# Altium PCB POWER.PcbDoc
Units mm, origin at the board's own origin, x right, y up, seen from the top; angles counter-clockwise.
Board outline 166.37 x 101.6 mm, 2 copper layers (Top Layer, Bottom Layer); 110 components, 38 nets, 257 pads, 26 vias.
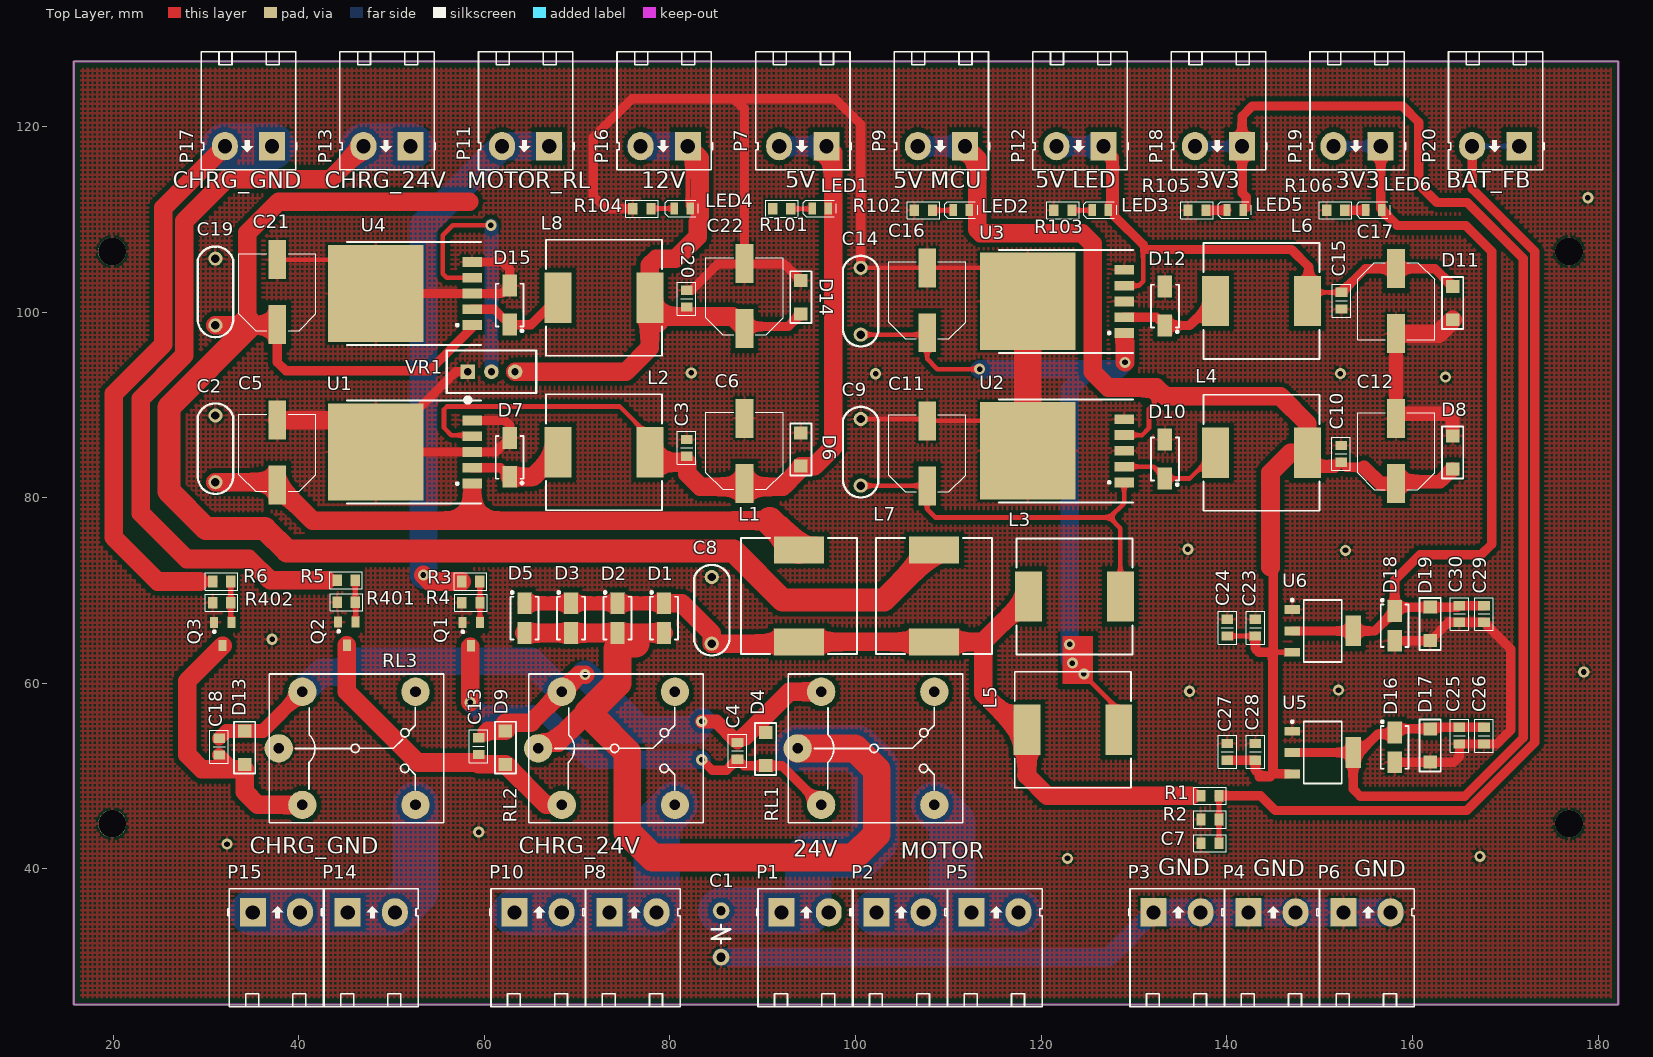
[diagram p0: Top Layer view]
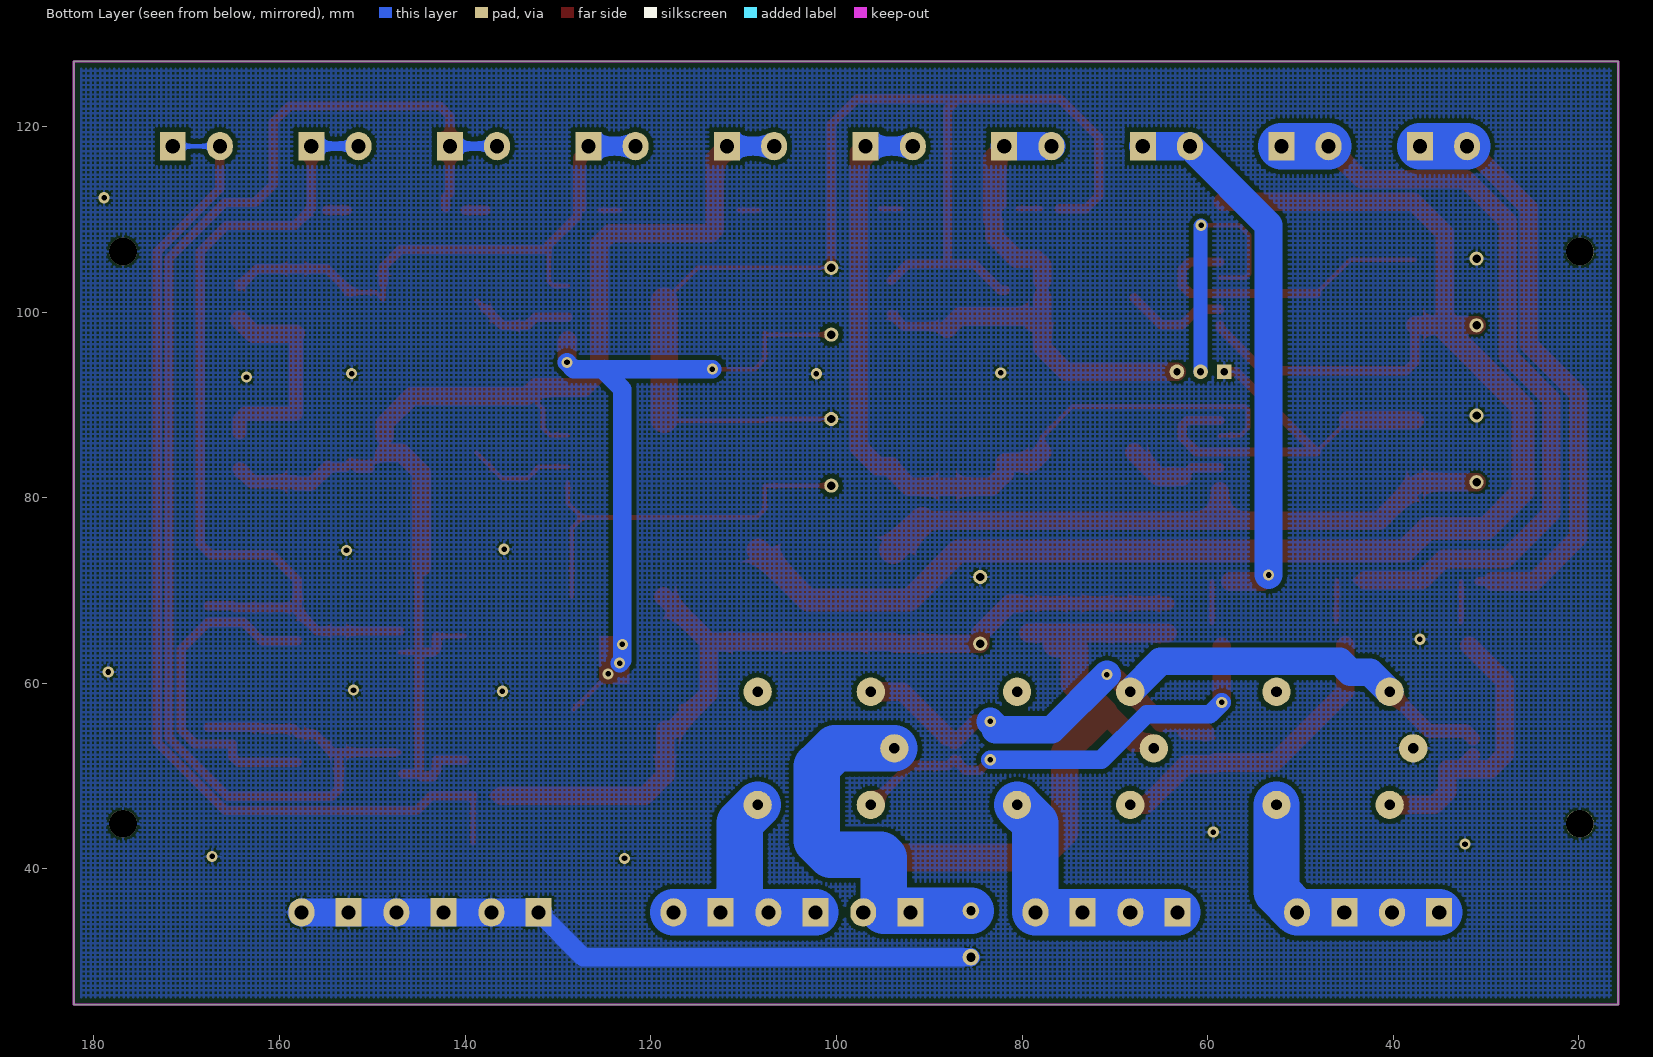
[diagram p1: Bottom Layer view, seen from below]

## Layer stack, top to bottom
Top Solder: solder mask 0.0102, Solder Resist, Dk 3.5
Top Layer: signal copper 0.0356
Dielectric 1: dielectric 0.32, FR-4, Dk 4.8
Bottom Layer: signal copper 0.0356
Bottom Solder: solder mask 0.0102, Solder Resist, Dk 3.5

## Board outline
15.775,25.4 182.15,25.4 182.15,127 15.775,127

## Design rules (kind name [scope] priority, off if disabled: settings)
Clearance [All] p1: gap=0.254 except(0.508: Arc-Poly Track-Poly SMDPad-Poly THPad-Poly Via-Poly Fill-Poly Poly-Poly Poly-Region Poly-Text)
PolygonConnect [All] p1: connectstyle=Relief reliefconductorwidth=0.254 reliefentries=4 polygonreliefangle="90 Angle" airgapwidth=0.254
RoutingVias [All] p1: holewidth=0.711 width=1.27 viastyle="Through Hole" minholewidth=0.711 minwidth=1.27 maxholewidth=0.711 maxwidth=1.27
SolderMaskExpansion [All] p1: expansion=0.102
Width [All] p1: maxlimit=5 minlimit=0.254 preferedwidth=0.254
30 further rules are at their usual default settings.

## Components (designator, comment, footprint, x,y, rotation, side; value= is the part's Value field where it differs from the comment)
C1 "C" "VARISTOR DISC 5MM/7MM" 85.5,35.5 r270 top
C2 "C" "C 104" 31.025,81.675 r90 top
C3 "C" "C 0805 (2012)" 81.8,85.375 r90 top
C4 "Cap Non-pol" "C 0805 (2012)" 87.275,52.725 r90 top
C5 "100uF/35V" "WCAP-PSHP 8x8.7x3.1" 37.7,84.85 r90 top
C6 "1000uF/16V" "WCAP-PSHP 8x8.7x3.1" 88.025,85.05 r90 top
C7 "106" "R 0805 (2012)" 138.175,42.775 r0 top
C8 "C" "C 104" 84.5,64.275 r90 top
C9 "C" "C 104" 100.55,81.3 r90 top
C10 "C" "C 0805 (2012)" 152.3,84.725 r90 top
C11 "100uF/35V" "WCAP-PSHP 8x8.7x3.1" 107.7,84.775 r90 top
C12 "1000uF/16V" "WCAP-PSHP 8x8.7x3.1" 158.225,85.025 r90 top
C13 "Cap Non-pol" "C 0805 (2012)" 59.375,53.225 r90 top
C14 "C" "C 104" 100.55,97.575 r90 top
C15 "C" "C 0805 (2012)" 152.35,101.225 r270 top
C16 "100uF/35V" "WCAP-PSHP 8x8.7x3.1" 107.7,101.275 r90 top
C17 "1000uF/16V" "WCAP-PSHP 8x8.7x3.1" 158.225,101.175 r270 top
C18 "Cap Non-pol" "C 0805 (2012)" 31.425,53.175 r90 top
C19 "C" "C 104" 31.025,98.575 r90 top
C20 "C" "C 0805 (2012)" 81.8,101.45 r90 top
C21 "100uF/35V" "WCAP-PSHP 8x8.7x3.1" 37.7,102.15 r90 top
C22 "1000uF/16V" "WCAP-PSHP 8x8.7x3.1" 88.025,101.725 r90 top
C23 "10uF" "C 0805 (2012)" 143.075,66 r90 top
C24 "100nF" "C 0805 (2012)" 140.05,66 r90 top
C25 "100nF" "C 0805 (2012)" 165.05,54.375 r270 top
C26 "10uF" "C 0805 (2012)" 167.7,54.375 r270 top
C27 "10uF" "C 0805 (2012)" 140.05,52.625 r90 top
C28 "100nF" "C 0805 (2012)" 143.075,52.625 r90 top
C29 "100nF" "C 0805 (2012)" 167.7,67.475 r270 top
C30 "10uF" "C 0805 (2012)" 165.05,67.475 r270 top
D1 "M3S" "DO-214AC (SMA)" 79.35,67.025 r90 top
D2 "M3S" "DO-214AC (SMA)" 74.342,67.025 r90 top
D3 "M3S" "DO-214AC (SMA)" 69.333,67.025 r90 top
D4 "Diode Zener" SOD-80 90.3,52.925 r90 top
D5 "M3S" "DO-214AC (SMA)" 64.325,67.025 r90 top
D6 "Z5.6V" SOD-80 94.1,85.2 r270 top
D7 "SS34" "DO-214AC (SMA) L" 62.725,84.35 r270 top
D8 "Z5.6V" SOD-80 164.325,84.875 r270 top
D9 "Diode Zener" SOD-80 62.275,53.075 r90 top
D10 "SS34" "DO-214AC (SMA) L" 133.325,84.175 r270 top
D11 "Z5.6V" SOD-80 164.325,100.975 r90 top
D12 "SS34" "DO-214AC (SMA) L" 133.325,100.65 r270 top
D13 "Diode Zener" SOD-80 34.175,53.075 r90 top
D14 "Z12V" SOD-80 94.1,101.6 r270 top
D15 "SS34" "DO-214AC (SMA) L" 62.725,100.75 r270 top
D16 "SS14" "DO-214AC (SMA)" 158.075,53.1 r90 top
D17 "Z3.6V" SOD-80 161.9,53.306 r90 top
D18 "SS14" "DO-214AC (SMA)" 158.075,66.2 r90 top
D19 "Z3.6V" SOD-80 161.9,66.406 r90 top
L1 "Component_1" 1210 93.9,69.425 r180 top
L2 "Component_1" 1210 72.875,84.9 r90 top
L3 "Component_1" 1210 123.575,69.358 r90 top
L4 "Component_1" 1210 143.725,84.85 r90 top
L5 "Component_1" 1210 123.4,55 r90 top
L6 "Component_1" 1210 143.725,101.2 r90 top
L7 "Component_1" 1210 108.45,69.425 r180 top
L8 "Component_1" 1210 72.875,101.55 r90 top
LED1 "Led" "Led SMD 0805" 96.15,111.161 r180 top
LED2 "Led" "Led SMD 0805" 111.375,111 r180 top
LED3 "Led" "Led SMD 0805" 126.35,111 r180 top
LED4 "Led" "Led SMD 0805" 81.275,111.161 r180 top
LED5 "Led" "Led SMD 0805" 140.85,111 r180 top
LED6 "Led" "Led SMD 0805" 155.8,111 r180 top
P1 "Header 2" "HDR Domino 2" 92.025,35.325 r0 top
P2 "Header 2" "HDR Domino 2" 102.25,35.325 r0 top
P3 "Header 2" "HDR Domino 2" 132.095,35.325 r0 top
P4 "Header 2" "HDR Domino 2" 142.325,35.325 r0 top
P5 "Header 2" "HDR Domino 2" 112.475,35.325 r0 top
P6 "Header 2" "HDR Domino 2" 152.55,35.325 r0 top
P7 "Header 2" "HDR Domino 2" 96.847,117.875 r180 top
P8 "Header 2" "HDR Domino 2" 73.475,35.325 r0 top
P9 "Header 2" "HDR Domino 2" 111.778,117.875 r180 top
P10 "Header 2" "HDR Domino 2" 63.25,35.325 r0 top
P11 "Header 2" "HDR Domino 2" 66.986,117.875 r180 top
P12 "Header 2" "HDR Domino 2" 126.708,117.875 r180 top
P13 "Header 2" "HDR Domino 2" 52.056,117.875 r180 top
P14 "Header 2" "HDR Domino 2" 45.275,35.325 r0 top
P15 "Header 2" "HDR Domino 2" 35.051,35.325 r0 top
P16 "Header 2" "HDR Domino 2" 81.917,117.875 r180 top
P17 "Header 2" "HDR Domino 2" 37.125,117.875 r180 top
P18 "Header 2" "HDR Domino 2" 141.639,117.875 r180 top
P19 "Header 2" "HDR Domino 2" 156.569,117.875 r180 top
P20 "Header 2" "HDR Domino 2" 171.5,117.875 r180 top
Q1 "C1815" SOT23B 58.575,65.3 r180 top
Q2 "C1815" SOT23B 45.187,65.35 r180 top
Q3 "C1815" SOT23B 31.8,65.325 r180 top
R1 "100K" "R 0805 (2012)" 138.175,47.9 r0 top
R2 "100K" "R 0805 (2012)" 138.175,45.338 r180 top
R3 "4K7" "R 0805 (2012)" 58.525,70.975 r0 top
R4 "100K" "R 0805 (2012)" 58.55,68.7 r0 top
R5 "4K7" "R 0805 (2012)" 45.113,71.1 r0 top
R6 "4K7" "R 0805 (2012)" 31.7,70.975 r0 top
R101 "R" "R 0805 (2012)" 92.05,111.125 r0 top
R102 "R" "R 0805 (2012)" 107.3,110.964 r0 top
R103 "R" "R 0805 (2012)" 122.325,110.964 r0 top
R104 "R" "R 0805 (2012)" 76.975,111.125 r0 top
R105 "R" "R 0805 (2012)" 136.775,110.964 r0 top
R106 "R" "R 0805 (2012)" 151.725,110.964 r0 top
R401 "100K" "R 0805 (2012)" 45.125,68.75 r0 top
R402 "100K" "R 0805 (2012)" 31.7,68.675 r0 top
RL1 "Relay 10A/12V" RL_SPDT_10A 93.75,53 r0 top
RL2 "Relay 10A/12V" RL_SPDT_10A 65.8,53 r0 top
RL3 "Relay 10A/12V" RL_SPDT_10A 37.85,53 r0 top
U1 "LM2576T-5.0" D2-PACK5 58.675,81.525 r90 top
U2 "LM2576T-5.0" D2-PACK5 128.925,81.65 r90 top
U3 "LM2576T-5.0" D2-PACK5 128.925,97.75 r90 top
U4 "LM2576T-5.0" D2-PACK5 58.675,98.6 r90 top
U5 "AMS1117 3V3" SOT-223 150.325,52.55 r0 top
U6 "AMS1117 3V3" SOT-223 150.325,65.65 r0 top
VR1 "VR" "R VAR E" 58.225,93.575 r0 top

## Footprints (in the part's own frame and the unit in brackets; to place one, negate y for a bottom-side part, rotate by r counter-clockwise, add the part's x,y. Pads: shape width x height; smd on the part's side, far side on the other; paste and mask are expansions set on the pad)
1210 [mm] "Precision Wire Wound Inductor, 2-Leads, Body 12.0x12.0mm, IPC Medium Density"
  rect 5.4x2.9 smd: 1(0,4.95) 2(0,-4.95)
  silkscreen extent -6.25,-6.25 6.25,6.25, body extent -6,-6 6,6, height 9.7
"C 104" [mil] "Capacitor"
  round 60 hole 35.43: 1(0,0) 2(283,0)
  silkscreen extent -50,-75 334,75, body extent -31,-81 315,77, height 315
"C 0805 (2012)" [mm] "Chip Capacitor, 2-Leads, Body 2.0x1.3mm, IPC Medium Density"
  rect 1x1.25 smd: 1(-0.9,0) 2(0.9,0)
  silkscreen extent -1.78,-1 1.78,1, body extent -1,-0.64 1,0.61, height 0.6
D2-PACK5 [mm] "D2-PAK; 5 Leads; Body 14.4 (inc. leads) x 10.4 mm (LxW max)"
  rect 1.05x2.1 smd: 1(0,0) 2(1.7,0) 3(3.4,0) 4(5.1,0) 5(6.8,0)
  rect 10.5x10.3 smd: 3(3.404,10.389)
  silkscreen extent -2.15,-0.95 8.95,13.5, body extent -1.6,-0.38 8.4,15.29, height 5.18
"DO-214AC (SMA)" [mm] "Molded Diode, 2-Leads, Body 4.3x2.7mm, IPC Medium Density"
  rect 2.35x1.55 smd: 1(-1.6,0) 2(1.6,0)
  silkscreen extent -2.3,-1.5 2.89,1.5, body extent -2.6,-1.3 2.6,1.3, height 2.4
"DO-214AC (SMA) L" [mm] "Molded Diode, 2-Leads, Body 4.3x2.7mm, IPC Medium Density"
  rect 2.35x1.55 smd: 1(-2.1,0) 2(2.1,0)
  silkscreen extent -2.3,-1.5 2.89,1.5, body extent -2.6,-1.3 2.6,1.3, height 2.4
"HDR Domino 2" [mil] "Header 2, 2 pin, hight 300mil, Pin to Pin 200, Colour Green"
  rect 110x120 hole 60: 1(0,0)
  oval 110x120 hole 60: 2(200,0)
  silkscreen extent -105,-400 300,100, body extent -90,-402 302,70, height 334
"Led SMD 0805" [mm] "Led SMD 0805"
  rect 0.8x1.25 smd: 1(-0.889,0) 2(0.838,0)
  silkscreen extent -1.78,-0.89 1.78,0.89, body extent -1.01,-0.62 1.01,0.63, height 1.1
"R 0805 (2012)" [mm] "Chip Resistor, 2-Leads, Body 2.0x1.3mm, IPC Medium Density"
  rect 1x1.25 smd: 1(-0.975,0) 2(0.975,0)
  silkscreen extent -1.75,-0.92 1.75,0.92, body extent -1,-0.61 1,0.59, height 0.5
"R VAR E" [mil]
  rect 62x62 hole 31: 1(0,0)
  round 62 hole 31: 2(100,0) 3(200,0)
  silkscreen extent -90,-130 290,90, body extent -93,-97 293,97, height 459
RL_SPDT_10A [mil] "Relay SPDT, 5 pin, 10A,W 650mil, L 800mil, H 800mil"
  round 120 hole 45: 1(0,0) 2(580,240) 3(580,-240) 4(100,-240) 5(100,240)
  silkscreen extent -40,-315 700,315, body extent -46,-304 706,306, height 602
SOD-80 [mm] "SOD-80 MiniMelf Diod case LL4148 3.7x1.6x0.5mm"
  rect 1.4x1.45 smd: 1(-1.8,0) 2(1.8,0)
  silkscreen extent -2.79,-1.14 2.79,1.14, body extent -1.8,-0.74 1.8,0.76, height 1.5
SOT23B [mm] "SOT 23B"
  rect 0.85x1.2 smd: 1(0.94,-1.245) 2(0,1.25) 3(-0.95,-1.25)
  silkscreen extent 0.77,-0.38 1.02,-0.13, body extent -1.5,-1.3 1.5,1.2, height 1.06
SOT-223 [mm] "SOT223, 4-Leads, Body 6.7x7.3mm (max), Pitch 2.30mm, IPC Medium Density"
  rect 1.65x0.95 smd: 1(-3.275,2.3) 2(-3.275,0) 3(-3.275,-2.3)
  rect 1.65x3.3 smd: 4(3.275,0)
  silkscreen extent -3.4,-3.35 2.05,3.45, body extent -3.5,-3.25 3.5,3.25, height 1.64
"VARISTOR DISC 5MM/7MM" [mm] "VARISTOR 23V 250A DISC 7MM"
  round 1.8 hole 1: 1(0,0) 2(5,0)
  silkscreen extent 1.5,-1 3.5,1, body extent -1.5,-1.26 6.5,1.25, height 11
"WCAP-PSHP 8x8.7x3.1" [mm] "Polarized capacitors, Aluminum Polymer Capacitors, 2-Leads, Body 8x8.7x3.1"
  rect 4.2x1.9 smd: 1(-3.5,0) 2(3.5,0)
  silkscreen extent -4.15,-4.15 4.15,4.15, body extent -4.5,-4.15 4.5,4.15

## Part data
C1 C2 C3 C8 C9 C10 C14 C15 C19 C20 C23 C24 C25 C26 C27 C28 C29 C30: library part "Capacitor NP", "Capacitor non-pol"
C4 C13 C18: "Non-polarized Capacitor"
C5 C11 C16 C21: library part CP3, "Cap 100uF/35V - 470uF/16V"
C6 C12 C17 C22: library part CP4, "Cap 1000uF/16V - 220uF/50V"
C7: library part CN2, "Cap np 104 => 105pF"
D1 D2 D3 D5 D16 D18: library part "Diode Schottky", "Schottky Diode"
D4 D9 D13: "Zener Diode"
D6 D8 D11 D14 D17 D19: library part "Diode Zener", "Zener Diode"
D7 D10 D12 D15: library part Zener
LED1 LED2 LED3 LED4 LED5 LED6: "Typical LED"
P1 P2 P3 P4 P5 P6 P7 P8 P9 P10 P11 P12 P13 P14 P15 P16 P17 P18 P19 P20: "Header, 2-Pin"
Q1 Q2 Q3: "NPN 600mW, ECB"
R1 R2 R3 R4 R5 R6 R101 R102 R103 R104 R105 R106 R401 R402: library part Resistor, "Resistor"
RL1 RL2 RL3: library part "Relay 1", "Relay SPDT,10A - 12VDC 5 Pin"
U1 U2 U3 U4: "SIMPLE SWITCHER; 3A Step-Down Voltage Regulator"
U5 U6: library part AMS1117, "1A LDO Voltage Regulator, ADJ or fixed 1.5/1.8/2.5/2.85/3.3/5V"
VR1: library part "Resistor Variable", "Resistor Variable"

## Free pads (board coordinates)
  round 3 hole 3: 0(19.902,106.523) 1(19.902,44.873) 2(176.852,106.523) 3(176.852,44.873)

## Via types
v1: diameter 1.2, hole 0.6, Top Layer to Bottom Layer, tented both sides, 26 vias

## Nets (pads, with @x,y where several pads share a name; then routed paths per layer and width w, separated by ;. In a path a pad name is that pad's centre, name@x,y a point inside that pad or via, vN(x,y) a via of type N, cw(c..) or ccw(c..) an arc to the next point about the centre after c; other vN are vias at no path point)
3V3_01: C25.1 C26.1 D16.2 D17.2 LED5.1 P18.1 P18.2 U5.2 U5.4 | length 155.2
  Top Layer w0.5: U5.2 U5.2@147.575,52.55 ; D17.2 D17.2@162.069,55.275
  Top Layer w1: LED5.1@142.075,111.25 142.075,112.4 141.639,112.836 P18.1 141.639,121.114 142.725,122.2 158.925,122.2 160.675,120.45 160.675,113.75 162.625,111.8 165.9,111.8 171.921,105.779 171.921,54.146 165.625,47.85 154.375,47.85 153.6,48.625 U5.4 ; U5.2@147.575,52.55 U5.4 ; D17.2 158.481,55.106 D16.2 157.925,54.55 156.25,54.55 154.25,52.55 U5.4 ; D17.2@162.069,55.275 C25.1 C26.1
  Bottom Layer w1: P18.2 P18.1
3V3_02: C29.1 C30.1 D18.2 D19.2 LED6.1 P19.1 P19.2 U6.2 U6.4 | length 94.4
  Top Layer w0.5: LED6.1@156.569,111.12 LED6.1 ; D18.2 D18.2@158.481,68.206 ; C30.1@164.881,68.206 C30.1
  Top Layer w1: U6.2 U6.4 155.925,65.65 D18.2 158.075,71.125 160.8,73.85 167.375,73.85 168.525,75 168.525,106.525 165.725,109.325 158.364,109.325 LED6.1 ; LED6.1@156.569,111.12 P19.1 ; D18.2@158.481,68.206 D19.2 C30.1@164.881,68.206 ; C30.1 C29.1
  Bottom Layer w1: P19.2 P19.1
5V_LED: C15.1 C17.1 D11.2 L6.2 LED3.1 P12.1 P12.2 U3.4 | length 69.3
  Top Layer w0.5: P12.1 127.239,117.344 LED3.1 ; U3.4 130.5,102.85 130.975,103.325 130.975,107.264 ; L6.2@148.825,103.1 148.825,101.35 149.6,102.125 C15.1
  Top Layer w1: P12.1@127.239,117.344 127.9,116.683 127.9,110.339 130.975,107.264 ; 131.489,106.75 146.95,106.75 148.825,104.875 L6.2@148.825,103.1 ; C15.1 154.9,104.675 C17.1 162.425,104.675 D11.2
  Bottom Layer w2: P12.2 P12.1
5V_LINE: C3.1 C6.1 D6.2 L2.2 LED1.1 P7.1 P7.2 U1.4 | length 122.2
  Top Layer w0.5: U1.4 58.575,86.725 56.45,86.725 55.65,87.525 55.65,89.5 55.975,89.825 74.575,89.825 77.825,86.575 L2.2 ; L2.2@78.25,84.475 C3.1 ; 97.039,84.889 LED1.1
  Top Layer w2: L2.2 78.25,84.475 78.9,83.825 81.8,83.825 81.875,83.75 81.875,82.575 83.275,81.175 92.125,81.175 94.1,83.15 D6.2 95.55,83.4 97.039,84.889 97.575,85.425 97.575,117.147 P7.1
  Bottom Layer w2: P7.2 P7.1
5V_MCU: C10.1 C12.1 C23.1 C24.1 C27.1 C28.1 D8.2 L4.2 LED2.1 P9.1 P9.2 U2.4 U5.3 U6.3 | length 166.4
  Top Layer w0.5: P9.1 P9.1@112.264,117.389 ; U2.4 130.854,86.75 131.6,87.496 131.6,89.525 132.2,90.125 132.2,91.875 ; C24.1 C23.1 ; 143.425,50.25 144.7,50.25 144.7,63.35 ; 145,63.35 U6.3 ; U5.3@146.65,50.25 U5.3 ; L4.2@148.675,86.7 L4.2 149.7,83.825 C10.1
  Top Layer w1: C27.1 C28.1 143.075,50.6 143.425,50.25 143.45,50.225 143.45,49.925 144.675,49.925 145,50.25 ; C23.1 143.075,63.7 143.425,63.35 144.7,63.35 ; 144.7,72.5 145,72.2 145,63.35 145,50.25 ; U5.3@146.65,50.25 145,50.25 ; 150.275,83.175 151.65,83.175 C10.1 152.85,83.275 154.775,83.275
  Top Layer w1.5: 154.775,83.275 156.525,81.525 C12.1 158.425,81.725 162.975,81.725 D8.2
  Top Layer w2: P9.1@112.264,117.389 113.1,116.553 113.1,108.9 113.5,108.5 124.4,108.5 125.525,107.375 125.525,93.575 127.225,91.875 132.2,91.875 132.4,91.875 133.35,90.925 145.75,90.925 148.675,88 L4.2@148.675,86.7 ; 144.7,72.5 144.7,82.7 146.85,84.85 L4.2
  Bottom Layer w2: P9.2 P9.1
12V: C20.1 C22.1 D14.2 L8.2 LED4.1 P16.1 P16.2 VR1.3 | length 70.3
  Top Layer w0.5: L8.2 L8.2@77.825,103.45 ; P16.1 81.917,111.408 LED4.1
  Top Layer w1: C22.1 88.25,98.45 92.75,98.45 D14.2
  Top Layer w2: VR1.3 75.25,93.575 77.825,96.15 L8.2 ; L8.2@77.825,103.45 77.825,105.05 78.5,105.725 80.575,105.725 82.975,108.125 82.975,109.7 83.2,109.925 83.2,116.592 P16.1 ; L8.2@78.775,98.875 78.775,99.525 86.725,99.525 C22.1
  Bottom Layer w3: P16.2 P16.1
12VIN: C4.2 C13.2 C18.2 D4.2 D9.2 D13.2 RL1.5 RL2.5 RL3.5 | length 87.4
  Top Layer w0.5: RL3.5@40.38,59.086 RL3.5 ; C13.2 60.1,54.125 60.475,54.5
  Top Layer w1.5: C18.2 32.225,54.875 D13.2 36.15,54.875 RL3.5@40.371,59.096 ; v1(83.425,55.9) 85,55.9 C4.2
  Top Layer w2: 60.25,54.725 60.4,54.875 D9.2 62.275,55.778 65.022,55.778 RL2.5 70.194,60.95 v1(70.85,60.95) ; 87.95,54.25 88.025,54.25 92.871,59.096 RL1.5
  Bottom Layer w3: RL3.5 42.494,61.2 44.6,61.2 45.774,62.374 65.062,62.374 RL2.5 ; v1(70.85,60.95) 76.8,55 82.85,55 82.85,55.325 v1(83.425,55.9)
24V: C1.1 D1.1 D2.1 D3.1 D5.1 P1.1 P1.2 RL1.1 RL2.1 | length 139.3
  Top Layer w0.5: RL2.1 66.425,53.625 70.387,57.587 71.15,56.825 71.963,56.012
  Top Layer w2: D5.1 D3.1 D2.1 D1.1 ; RL2.1@66.425,53.625 67.95,53.625 71.15,56.825
  Top Layer w3: 71.15,56.825 74.342,60.017 74.342,63.7 74.917,64.275 76.275,64.275 ; 71.963,56.012 75.4,52.575 75.4,43.975 78.15,41.225 99.75,41.225 102.275,43.75 102.275,50.65 99.925,53 RL1.1
  Bottom Layer w5: C1.1 94.875,35.5 94.875,41.2 95.225,41.55 100.625,41.55 102.1,43.025 102.1,51.05 100.15,53 RL1.1
CHARGE: P8.1 P8.2 P10.1 P10.2 RL2.3 | length 27.7
  Bottom Layer w5: P10.1 P10.2 P8.1 P8.2 78.555,44.927 RL2.3
CHARGE_24_RELAY: P13.1 P13.2 R5.1 | length 85.3
  Top Layer w0.5: 43,71.1 R5.1
  Top Layer w2: 43,71.1 36.925,71.1 34.625,73.4 27.925,73.4 23,78.325 23,90.675 27.675,95.35 27.675,109.8 32.2,114.325 43.426,114.325 P13.2
  Bottom Layer w5: P13.2 P13.1
CHARGE_GND: P14.1 P14.2 P15.1 P15.2 RL3.3 | length 27.8
  Bottom Layer w5: P15.1 P15.2 P14.1 P14.2 52.582,37.552 RL3.3
CHARGE_GND_RELAY: P17.1 P17.2 R6.1 | length 64.8
  Top Layer w0.5: 29.325,70.975 29.9,70.975
  Top Layer w1: 29.9,70.975 R6.1
  Top Layer w2: 29.325,70.975 24.825,70.975 20.075,75.725 20.075,91.179 25.421,96.525 25.421,111.251 P17.2
  Bottom Layer w5: P17.2 P17.1
GND: C1.2 C2.2 C3.2 C5.2 C6.2 C7.1 C8.2 C9.2 C10.2 C11.2 C12.2 C14.2 C15.2 C16.2 C17.2 C19.2 C20.2 C21.2 C22.2 C23.2 C24.2 C25.2 C26.2 C27.2 C28.2 C29.2 C30.2 D6.1 D7.1 D8.1 D10.1 D11.1 D12.1 D14.1 D15.1 D16.1 D17.1 D18.1 D19.1 P3.1 P3.2 P4.1 P4.2 P6.1 P6.2 pad.0 pad.1 pad.2 pad.3 Q1.1 Q2.1 Q3.1 R2.2 R4.1 R102.1 R103.1 R104.1 R105.1 R106.1 R401.1 R402.1 RL3.1 U1.3 U1.5 U2.3 U2.5 U3.3 U3.5 U4.3 U4.5 U5.1 U6.1 VR1.1 | length 361.8
  Top Layer w0.5: C21.2 44.64,105.65 U4.3@48.286,102.004 ; U1.3@44.865,88.35 U1.3@48.286,84.929 ; C9.2 107.487,88.488 C11.2 110.975,88.275 118.336,88.275 U2.3@118.536,88.475 ; C14.2 107.688,104.763 C16.2 114.915,104.775 U3.3@118.536,101.154 ; D16.1 D16.1@158.081,51.506 ; C12.2 163.9,88.525 164.075,88.7 ; D19.1@161.894,64.6 D19.1 ; D8.1 D8.1@164.325,87.05
  Top Layer w1: U4.3@48.286,102.004 48.29,102 58.675,102 61.875,102 D15.1 62.725,104.625 61.95,105.4 U4.5 ; VR1.1 56.933,93.575 48.286,84.929 48.29,84.925 58.675,84.925 61.2,84.925 D7.1 62.725,87.8 62.2,88.325 U1.5 ; R104.1 73.125,111.125 71.725,112.525 71.725,118.825 75.9,123 86.9,123 ; C20.2 82.325,102.35 85.15,105.175 92.325,105.175 D14.1 ; C22.2 88.025,121.875 86.9,123 ; C14.2 100.55,120.225 97.775,123 86.9,123 ; D18.1 D19.1@161.894,64.6 ; D16.1@158.081,51.506 D17.1 164.431,51.506 165.05,52.125 C25.2 C26.2 169.075,53.475 170.575,54.975 170.575,63.7 C29.2 C30.2 163.869,66.575 D19.1
  Top Layer w1.5: C17.2 158.225,89.075 163.7,89.075 164.075,88.7 164.325,88.45 D8.1@164.325,87.05
  Top Layer w2: C5.2 U1.3@44.865,88.35 ; C17.2 162.825,97.675 D11.1
  Top Layer w3: U2.3@118.536,88.475 U3.3@118.536,101.154
  Bottom Layer w2: C1.2 127.27,30.5 P3.1
  Bottom Layer w3: P3.1 P3.2 P4.1 P4.2 P6.1 P6.2
  other v1: 122.825,41.148 167.25,41.35 32.275,42.675 59.4,43.975 135.975,59.15 152.025,59.275 178.45,61.225 37.125,64.75 152.775,74.325 135.8,74.45 163.55,93 102.15,93.35 152.225,93.375 82.296,93.45 178.9,112.325
MOTOR: P2.1 P2.2 P5.1 P5.2 RL1.3 | length 33.4
  Bottom Layer w3: P2.1@102.25,35.225 P2.2@107.33,35.225
  Bottom Layer w5: P2.1 P2.2 P5.1@111.975,35.325 ; RL1.3 110.425,44.961 110.425,36.875 P5.1@111.975,35.325 ; P5.2 P5.1 P5.1@111.975,35.325
MOTOR_RELAY: P11.1 P11.2 R3.1 | length 59.2
  Top Layer w2: v1(53.425,71.675) 54.125,70.975 R3.1
  Bottom Layer w3: v1(53.425,71.675) 53.425,109.394 P11.2 P11.1
NetC2_1: C2.1 C5.1 L1.2 U1.1 | length 69
  Top Layer w2: C2.1 37.175,81.675 C5.1@37.6,81.25 ; C5.1 41.525,77.525 58.675,77.525 ; 58.675,80.675 58.675,77.525 ; 90.75,77.525 58.675,77.525
  Top Layer w3: 90.75,77.525 L1.2
NetC4_1: C4.1 D4.1 Q1.2 RL1.4 | length 49.5
  Top Layer w0.5: Q1.2@58.475,63.95 Q1.2
  Top Layer w1: v1(83.425,51.775) 84.55,50.65 86.1,50.65 C4.1 87.975,51.125 D4.1 92.069,51.125 RL1.4
  Top Layer w2: v1(58.475,57.95) Q1.2@58.475,63.95
  Bottom Layer w2: v1(58.475,57.95) 59.775,56.65 66.575,56.65 71.45,51.775 v1(83.425,51.775)
NetC9_1: C9.1 C11.1 L3.2 U2.1 | length 43.1
  Top Layer w0.5: C9.1 107.675,81.3 C11.1 107.7,78.775 108.6,77.875 127.375,77.875 ; L3.2 128.525,76.725 127.375,77.875 ; U2.1 128.925,79.425 127.375,77.875
NetC13_1: C13.1 D9.1 Q2.2 RL2.4 | length 33.2
  Top Layer w2: Q2.2 45.187,59.113 52.875,51.425 52.925,51.475 59.2,51.475 59.4,51.275 D9.1 66.646,46.904 RL2.4
NetC14_1: C14.1 C16.1 L5.2 U3.1 | length 75
  Top Layer w0.5: C14.1 107.5,97.575 C16.1 107.7,94.95 108.8,93.85 v1(113.35,93.85) ; v1(123.35,62.175) L5.2@128.35,57.175 ; 128.925,96.95 U3.1
  Top Layer w2: 128.925,96.95 128.925,96.875 129.025,96.775 v1(129.025,94.575)
  Bottom Layer w2: v1(113.35,93.85) 125,93.85 ; v1(123.35,62.175) 123.05,62.475 123.05,91.7 125,93.65 125,93.85 ; v1(129.025,94.575) 128.3,93.85 125,93.85
  other v1: 124.6,61.025 123.05,64.2
NetC18_1: C18.1 D13.1 Q3.2 RL3.4 | length 30.8
  Top Layer w1.5: C18.1 32.425,51.275
  Top Layer w2: Q3.2 27.975,60.25 27.975,52.325 29.575,50.725 34.175,50.725 34.175,48.325 35.596,46.904 RL3.4
NetC19_1: C19.1 C21.1 L7.2 U4.1 | length 194.4
  Top Layer w0.5: 34.85,98.575 34.85,108.5 38.25,111.9 ; C21.1@37.625,98.575 C21.1
  Top Layer w1: C21.1 37.7,94.6 38.625,93.675 54.05,93.675 58.675,98.3 U4.1
  Top Layer w2: C19.1 33.525,98.575 34.45,99.5 34.45,108.525 37.825,111.9 38.25,111.9 58.35,111.9 ; 34.85,98.575 C21.1@37.625,98.575
  Top Layer w2.5: 34.85,98.575 26.025,89.75 26.025,80.675 30.025,76.675 36.35,76.675 38.75,74.275 86.842,74.275 92.142,68.975 103.05,68.975 L7.2
NetD7_2: D7.2 L2.1 U1.2 | length 10.6
  Top Layer w1: U1.2 61.75,83.225 62.425,82.55 D7.2@62.725,82.55
  Top Layer w2: D7.2 65.275,82.25 L2.1
NetD10_2: D10.2 L4.1 U2.2 | length 11.5
  Top Layer w0.5: U2.2 132.05,83.35 D10.2 136,82.075 L4.1
NetD12_2: D12.2 L6.1 U3.2 | length 11.3
  Top Layer w0.5: L6.1@137.887,100.362 138.725,101.2 L6.1
  Top Layer w1: U3.2 132.425,99.45 D12.2 135.975,98.55 137.787,100.362 L6.1@137.887,100.362
NetD15_2: D15.2 L8.1 U4.2 | length 11.1
  Top Layer w1: U4.2 61.075,100.3 D15.2 65.025,98.65 L8.1
NetLED1_2: LED1.2 R101.2 | length 2.3
  Top Layer w0.5: R101.2 95.276,111.125 LED1.2
NetLED2_2: LED2.2 R102.2 | length 2.3
  Top Layer w0.5: R102.2 110.501,110.964 LED2.2
NetLED3_2: LED3.2 R103.2 | length 2.2
  Top Layer w0.5: R103.2 125.476,110.964 LED3.2
NetLED4_2: LED4.2 R104.2 | length 2.5
  Top Layer w0.5: R104.2 77.986,111.161 LED4.2
NetLED5_2: LED5.2 R105.2 | length 2.2
  Top Layer w1: R105.2 LED5.2@139.976,110.964
NetLED6_2: LED6.2 R106.2 | length 2.3
  Top Layer w0.5: LED6.2@154.926,110.964 LED6.2
  Top Layer w1: R106.2 LED6.2@154.926,110.964
NetQ1_3: Q1.3 R3.2 R4.2 | length 4.4
  Top Layer w0.5: R3.2 59.525,70.95 R4.2 Q1.3
NetQ2_3: Q2.3 R5.2 R401.2 | length 4.5
  Top Layer w0.5: R5.2 46.088,68.763 R401.2 46.138,68.712 Q2.3
NetQ3_3: Q3.3 R6.2 R402.2 | length 4.4
  Top Layer w0.5: R6.2 R402.2 32.675,66.65 Q3.3
NetU4_4: U4.4 VR1.2 | length 28.9
  Top Layer w0.5: U4.4 55.95,103.7 55.525,104.125 55.525,108.275 56.6,109.35 v1(60.7,109.35)
  Bottom Layer w1.5: v1(60.7,109.35) 60.765,109.285 VR1.2
V_BAT: C7.2 P20.1 P20.2 R1.2 R2.1 | length 115
  Top Layer w0.5: C7.2 R2.1 R1.2
  Top Layer w1: R1.2 143.625,47.9 145.225,46.3 165.848,46.3 173.175,53.627 173.175,106.525 166.42,113.28 P20.2
  Bottom Layer w0.5: P20.2 P20.1
VIN: C8.1 D1.2 D2.2 D3.2 D5.2 L1.1 L3.1 L5.1 L7.1 R1.1 | length 95.4
  Top Layer w0.5: D1.2 80.15,68.625 ; 113.742,64.175 113.742,64.475 ; 136.125,47.9 R1.1
  Top Layer w1.5: D5.2 D3.2 D2.2 D1.2
  Top Layer w2: 80.15,68.625 81.275,68.625 84.5,65.4 C8.1 93.7,64.275 L1.1 L7.1 113.742,64.475 L3.1 ; 113.742,64.175 113.742,58.908 117.65,55 L5.1 118.45,50.175 118.4,50.125 120.625,47.9 136.125,47.9
pads on no net: R101.1 RL1.2 RL2.2 RL3.2

## Polygon pours and split planes (outlines as drawn)
GND on Bottom Layer "GND_L02_P002" (hatched 90Degree grid 0.508 track 0.254, remove dead copper, pour order 2): 15.775,127 15.775,25.4 182.15,25.4 182.15,127
GND on Top Layer "GND_L01_P006" (hatched 90Degree grid 0.508 track 0.254, remove dead copper, pour order 6): 15.575,127.05 15.575,25.4 181.975,25.4 182.15,25.4 182.15,127

## Keep-outs
Keep-Out Layer:
  the board outline again, w0.254

## Other copper
Top Layer:
  rectangle net NetC14_1: 122.3,59.925 125.6,65.1

## Silkscreen, mask and mechanical layers (free items; w line width, h text height)
Top Overlay:
  text "12V" at 76.9,112.775 h3
  text "5V" at 92.425,112.786 h3
  text "5V LED" at 119.375,112.786 h3
  text "3V3" at 136.65,112.775 h3
  text "3V3" at 151.75,112.775 h3
  text "BAT_FB" at 163.65,112.786 h3
  text "CHRG_GND" at 26.425,112.75 h3
  text "CHRG_24V" at 42.8,112.75 h3
  text "MOTOR_RL" at 58.175,112.75 h3
  text "5V MCU" at 104.075,112.75 h3
  text "CHRG_GND" at 34.75,41.075 h3
  text "CHRG_24V" at 63.7,41.05 h3
  text "24V" at 93.275,40.725 h3
  text "MOTOR" at 104.875,40.5 h3
  text "GND" at 132.6,38.75 h3
  text "GND" at 142.825,38.6 h3
  text "GND" at 153.725,38.55 h3